# Altium PCB MDBU017A.PcbDoc (part 2 of 2)
Units mil, origin at the board's own origin, x right, y up, seen from the top; angles counter-clockwise.
Board outline 2200 x 2400 mil, 4 copper layers (Top Layer, Signal Layer 1, Signal Layer 2, Bottom Layer), stack 62.8 mil thick; 116 components, 72 nets, 394 pads, 309 vias.
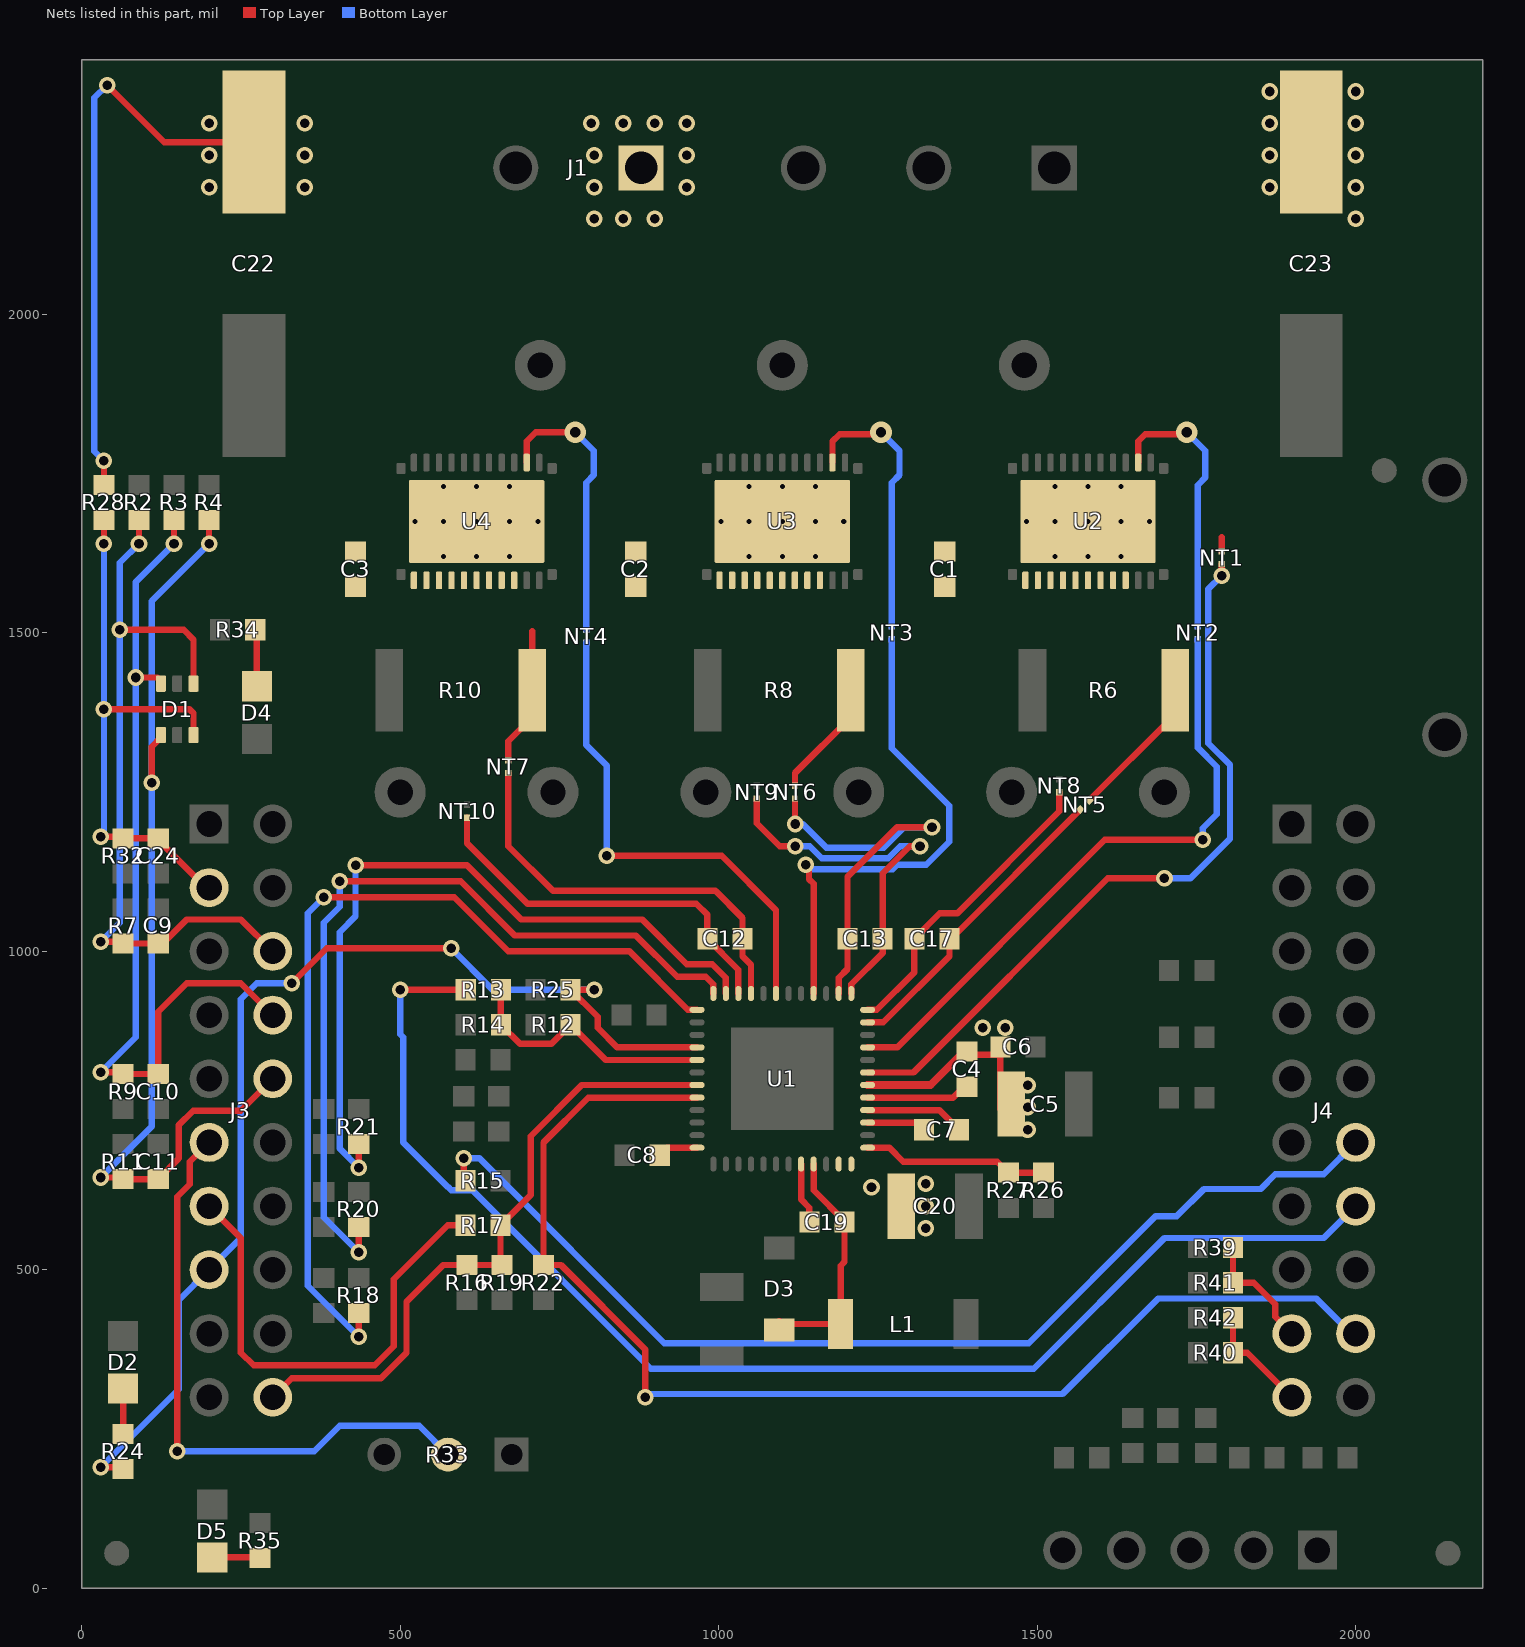
[diagram p4: the nets of this part, all layers, seen from the top]

## Via types
v1: diameter 26, hole 15, Top Layer to Bottom Layer, tented both sides, 250 vias
v2: diameter 19.68, hole 7.87, Top Layer to Bottom Layer, 45 vias
v3: diameter 34, hole 16, Top Layer to Bottom Layer, tented both sides, 9 vias
v4: diameter 26/26/26/26 (per signal layer), hole 15, Top Layer to Bottom Layer, tented both sides, 5 vias

## Nets (pads, with @x,y where several pads share a name; then routed paths per layer and width w, separated by ;. In a path a pad name is that pad's centre, name@x,y a point inside that pad or via, vN(x,y) a via of type N, cw(c..) or ccw(c..) an arc to the next point about the centre after c; other vN are vias at no path point) (continued)
NetC4_2: C4.2 U1.5 | length 151.1
  Top Layer w10: U1.5@1233.86,770.47 1368.03,770.47 C4.2@1380,782.44
NetC7_1: C7.1 U1.4 | length 156.5
  Top Layer w10: U1.4@1233.86,750.79 1346.77,750.79 C7.1@1377.56,720
NetC7_2: C7.2 U1.3 | length 93.2
  Top Layer w10: U1.3@1233.86,731.1 1311.34,731.1 C7.2@1322.44,720
NetC8_1: C8.1 U1.36 | length 63.4
  Top Layer w10: C8.1@907.56,680 919.29,691.73 U1.36@966.14,691.73
NetC19_1: C19.1 U1.44 | length 96.5
  Top Layer w10: U1.44@1129.53,666.14 1129.53,610.47 1142.44,597.56 C19.1@1142.44,575
NetC19_2: C19.2 D3.1 L1.1 U1.45 | length 372.2
  Top Layer w10: D3.1@1095,419.8 1099.8,415 L1.1@1191.57,415 1191.57,506.57 1197.56,512.56 C19.2@1197.56,575 1197.56,576.48 1149.21,624.83 U1.45@1149.21,666.14
NetD2_2: D2.2 R24.2 | length 71.1
  Top Layer w10: R24.2@65,242.56 D2.2@65,313.66
NetD4_2: D4.2 R34.2 | length 89.7
  Top Layer w10: R34.2@272.56,1505 275,1502.56 D4.2@275,1416.34
NetD5_2: D5.2 R35.2 | length 75.5
  Top Layer w10: D5.2@205,48.66 278.78,48.66 R35.2@280,47.44
NetJ4_17: J4.17 R39.1 R41.2 | length 192.3
  Top Layer w10: R39.1@1807.56,535 R41.2@1807.56,480 1840,480 1873.82,446.18 1873.82,426.18 J4.17@1900,400
NetJ4_19: J4.19 R40.1 R42.2 | length 176.4
  Top Layer w10: R42.2@1807.56,425 R40.1@1807.56,370 1830,370 J4.19@1900,300
NetNT2_1: NT2.1 U2.2 | length 437.4
  Top Layer w10: U2.2@1658.74,1767.52 1658.74,1800.71 1670.04,1812.01 1732.01,1812.01 v3(1735,1815)
  Bottom Layer w10: v3(1735,1815) 1764,1786 1764,1744 1752,1732 NT2.1@1752,1510
NetNT3_1: NT3.1 U3.2 | length 433.1
  Top Layer w10: U3.2@1178.74,1767.52 1178.74,1800.71 1190.04,1812.01 v3@1252.01,1812.01
  Bottom Layer w10: v3(1255,1815) 1284,1786 1284,1747.99 1272,1735.99 NT3.1@1272,1510
NetNT4_1: NT4.1 U4.2 | length 442.4
  Top Layer w10: U4.2@698.74,1767.52 698.74,1800.71 713.03,1815 v3(775,1815)
  Bottom Layer w10: v3(775,1815) 804,1786 804,1747.99 792,1735.99 NT4.1@792,1505
NetR12_1: R12.1 R13.1 R14.1 U1.29 | length 410.9
  Top Layer w10: R13.1@658.11,940 R14.1@658.11,885 688.11,855 737.56,855 R12.1@767.56,885 823.03,829.53 U1.29@966.14,829.53
NetR26_1: R26.1 R27.2 U1.1 | length 292.4
  Top Layer w10: U1.1@1233.86,691.73 1268.27,691.73 1290,670 1437.56,670 R27.2@1455,652.56 R26.1@1510,652.56
NFAULT: J3.15 R24.1 R25.1 U1.28 | length 1761.2
  Top Layer w10: v1(30,190) 62.44,190 R24.1@65,187.44 ; v1(330,950) 385,1005 v1(580,1005) ; v1(805,940) R25.1@767.56,940 810,897.56 810,880 840.79,849.21 U1.28@966.14,849.21
  Bottom Layer w10: v1(30,190) 152.5,312.5 152.5,452.5 J3.15@200,500 250,550 250,925 275,950 v1(330,950) ; v1(580,1005) 645,940 v1(805,940)
NSCS/GAIN: J4.18 R22.2 U1.32 | length 1954.7
  Top Layer w10: v1(885,300) 885,375 752.44,507.56 R22.2@725,507.56 725,700 795.47,770.47 U1.32@966.14,770.47
  Bottom Layer w10: v1(885,300) 890,305 1540,305 1690,455 1938.21,455 1993.21,400 J4.18@2000,400
POT: J3.11 R33.2 | length 965.9
  Top Layer w10: v1(150,215) 150,615 169.5,634.5 169.5,669.5 J3.11@200,700
  Bottom Layer w10: v1(150,215) 365,215 405,255 530,255 R33.2@575,210
SCLK: J3.13 R17.2 | length 764.1
  Top Layer w10: J3.13@200,600 250,550 250,370 270,350 460,350 490,380 490,485 575,570 R17.2@602.44,570
SDI: J4.12 R15.2 | length 1686.6
  Top Layer w10: v1(600,675) 600,642.44 R15.2@602.44,640
  Bottom Layer w10: v1(600,675) 624.64,675 914.64,385 1486.92,385 1685.92,584 1719,584 1762,627 1851.04,627 1874.04,650 1950,650 J4.12@2000,700
SDO: J4.14 R13.2 | length 2092.7
  Top Layer w10: v1(500,940) R13.2@602.99,940
  Bottom Layer w10: v1(500,940) 500,870 505,865 505,700 575,630 575.36,630 580.36,625 613.7,625 893.7,345 1495,345 1700,550 1950,550 J4.14@2000,600
SHA: NT2.2 U1.9 | length 997.6
  Top Layer w10: U1.9@1233.86,849.21 1280.33,849.21 1606.11,1175 v1(1760,1175)
  Bottom Layer w10: NT2.2@1752,1490 1752,1320 1782,1290 1782,1215.39 1760,1193.39 v1(1760,1175)
SHB: NT3.2 U1.16 | length 801.2
  Top Layer w10: v1@1142,1130.62 1142,1113.46 1149.21,1106.24 U1.16@1149.21,933.86
  Bottom Layer w10: v1(1136.74,1135.88) 1143.62,1129 1273.2,1129 1280.08,1135.88 1325.88,1135.88 1362.28,1172.28 1362.28,1228.83 1272,1319.11 NT3.2@1272,1490
SHC: NT4.2 U1.19 | length 780.5
  Top Layer w10: v1(824.31,1150) 1005,1150 1090.16,1064.84 U1.19@1090.16,933.86
  Bottom Layer w10: NT4.2@792,1485 792,1324.11 824.31,1291.8 v1(824.31,1150)
SLA: C1.2 NT5.2 R6.2 U2.12 U2.13 U2.14 U2.15 U2.16 U2.17 U2.18 U2.19 U2.20 | length 226.8
  Top Layer w10: NT5.2@1582.07,1237.07 R6.2@1712.2,1367.2 ; R6.2@1717.2,1367.2 R6.2@1717.2,1410
SLB: C2.2 NT6.2 R8.2 U3.12 U3.13 U3.14 U3.15 U3.16 U3.17 U3.18 U3.19 U3.20 | length 186.1
  Top Layer w10: NT6.2@1120,1260 1120,1280 1207.2,1367.2 R8.2@1207.2,1410
SLC: C3.2 NT7.2 R10.2 U4.12 U4.13 U4.14 U4.15 U4.16 U4.17 U4.18 U4.19 U4.20 | length 218.2
  Top Layer w10: NT7.2@670,1300 670,1330 707.2,1367.2 R10.2@707.2,1410 707.2,1502.8
SNA: C17.2 NT8.1 U1.12 | length 491.1
  Top Layer w10: U1.12@1233.86,908.27 1248.27,908.27 1307.44,967.44 C17.2@1307.44,1020 1347.44,1060 1375,1060 1535,1220 NT8.1@1535,1250
SNB: C13.2 NT9.1 U1.13 | length 611.1
  Top Layer w10: NT9.1@1060,1240 1060,1201.11 1096.11,1165 v1(1120,1165) ; U1.13@1208.27,933.86 1208.27,948.27 1257.56,997.56 C13.2@1257.56,1020 1257.56,1122.56 1300,1165 v1(1316.2,1165)
  Bottom Layer w10: v1(1120,1165) 1142.97,1165 1161.97,1146 1266.15,1146 1285.06,1164.91 1316.11,1164.91 v1(1316.2,1165)
SNC: C12.2 NT10.1 U1.22 | length 607.9
  Top Layer w10: NT10.1@605,1210 605,1170 700,1075 965,1075 982.44,1057.56 C12.2@982.44,1020 1031.1,971.34 U1.22@1031.1,933.86
SOA: R18.2 U1.25 | length 1430.3
  Top Layer w10: v1(380,1085) 585,1085 670,1000 860,1000 951.73,908.27 U1.25@966.14,908.27 ; v1(435,395) R18.2@435,432.44
  Bottom Layer w10: v1(380,1085) 355,1060 355,475 v1(435,395)
SOB: R20.2 U1.24 | length 1323.2
  Top Layer w10: v1(405,1110) 595,1110 680,1025 870,1025 935,960 980,960 991.73,948.27 U1.24@991.73,933.86 ; v1(435,527.76) R20.2@435,567.44
  Bottom Layer w10: v1(405,1110) 405,1070 380,1045 380,582.76 v1(435,527.76)
SOC: R21.2 U1.23 | length 1213.3
  Top Layer w10: v1(430,1135) 605,1135 690,1050 880,1050 950,980 990,980 1011.42,958.58 U1.23@1011.42,933.86 ; v1(435,660.57) R21.2@435,697.44
  Bottom Layer w10: v1(430,1135) 430,1055 405,1030 405,690.57 v1(435,660.57)
SPA: C17.1 NT5.1 U1.11 | length 484.5
  Top Layer w10: U1.11@1233.86,888.58 1258.58,888.58 1362.56,992.56 C17.1@1362.56,1020 1365,1020 NT5.1@1565,1220
SPB: C13.1 NT6.1 U1.14 | length 637.6
  Top Layer w10: v1(1120,1200) NT6.1@1120,1240 ; U1.14@1188.58,933.86 1188.58,958.58 1202.44,972.44 C13.1@1202.44,1020 1202.44,1117.44 1280,1195 v1(1335,1195)
  Bottom Layer w10: v1(1120,1200) 1132.02,1200 1169.02,1163 1259.11,1163 1291.11,1195 v1(1335,1195)
SPC: C12.1 NT7.1 U1.21 | length 653.2
  Top Layer w10: NT7.1@670,1280 670,1165 740,1095 995,1095 1037.56,1052.44 C12.1@1037.56,1020 1037.56,992.44 1050.79,979.21 U1.21@1050.79,933.86
VDRAIN: NT1.1 U1.7 | length 1175.2
  Top Layer w10: U1.7@1233.86,809.84 1305.96,809.84 1611.11,1115 v1(1700,1115) ; v1(1790,1590) NT1.1@1790,1608.24
  Bottom Layer w10: v1(1700,1115) 1740.96,1115 1802.98,1177.02 1802.98,1293.06 1769,1327.04 1769,1569 v1(1790,1590)
VDS: J3.20 R16.1 R17.1 R19.2 U1.31 | length 1006.8
  Top Layer w10: J3.20@300,300 330,330 470,330 510,370 510,450 567.56,507.56 R16.1@605,507.56 R19.2@660,507.56 ; R19.2@657.56,510 R17.1@657.56,570 705,617.44 705,710 785.16,790.16 U1.31@966.14,790.16
VM: C1.1 C2.1 C3.1 C4.1 C5.1 C6.1 C20.1 C22.1 C23.1 J1.1 NT1.2 R28.2 U1.6 U1.47 U1.48 U2.27 U3.27 U4.27 | length 1251.6
  Top Layer w10: R28.2@35,1732.56 v1(35,1770) ; v1(40,2360) 129.54,2270.46 C22.1@270.49,2270.46 ; C4.1@1380,837.56 1440,837.56 1442.44,840 1442.44,752.6 C5.1@1445.04,750 ; NT1.2@1790,1628.24 1790,1650
  Top Layer w12: U1.6@1233.86,790.16 1332.6,790.16 C4.1@1380,837.56
  Bottom Layer w10: v1(35,1770) 20,1785 20,2340 v1(40,2360)
  other v1: 1325,565 1325,600 1240,630 1325,635 1485,720 1485,755 1485,790 1415,880 1450,880 805,2150 850,2150 900,2150 2000,2150 200,2200 350,2200 805,2200 950,2200 1865,2200 2000,2200 200,2250 350,2250 805,2250 950,2250 1865,2250 2000,2250 200,2300 350,2300 800,2300 850,2300 900,2300 950,2300 1865,2300 2000,2300 1865,2350 2000,2350
  other v2: 568.03,1619.88 620,1619.88 671.97,1619.88 1048.03,1619.88 1100,1619.88 1151.97,1619.88 1528.03,1619.88 1580,1619.88 1631.97,1619.88 523.54,1675 568.03,1675 620,1675 671.97,1675 716.46,1675 1003.54,1675 1048.03,1675 1100,1675 1151.97,1675 1196.46,1675 1483.54,1675 1528.03,1675 1580,1675 1631.97,1675 1676.46,1675 568.03,1730.12 620,1730.12 671.97,1730.12 1048.03,1730.12 1100,1730.12 1151.97,1730.12 1528.03,1730.12 1580,1730.12 1631.97,1730.12
VSENA: C9.1 D1.1 J3.6 R2.1 R7.2 | length 1181.8
  Top Layer w10: v1(30,1015) 62.44,1015 R7.2@65,1012.44 127.44,1012.44 165,1050 250,1050 J3.6@300,1000 ; v1(60,1505) 160,1505 175.59,1489.41 D1.1@175.59,1424.29 ; v1(90,1640) R2.1@90,1677.44
  Bottom Layer w10: v1(30,1015) 60,1045 v1(60,1505) 60,1610 v1(90,1640)
VSENB: C10.1 D1.3 J3.8 R3.1 R9.2 | length 1363.8
  Top Layer w10: v1(30,810) R9.2@62.56,810 ; R9.2@65,807.56 C10.1@122.56,807.56 ; v1(85,1430) 118.7,1430 D1.3@124.41,1424.29 ; C10.1@120,807.56 120,905 165,950 250,950 J3.8@300,900 ; v1(145,1640) R3.1@145,1677.44
  Bottom Layer w10: v1(30,810) 85,865 v1(85,1430) 85,1580 v1(145,1640)
VSENC: C11.1 D1.4 J3.10 R4.1 R11.2 | length 1550.3
  Top Layer w10: v1(30,645) 62.44,645 R11.2@65,642.44 C11.1@120,642.44 152.5,674.94 152.5,727.5 175,750 250,750 J3.10@300,800 ; v1@112.6,1267.6 v1(110,1265) 110,1321.3 D1.4@124.41,1335.71 ; v1(200,1640) R4.1@200,1677.44
  Bottom Layer w10: v1(30,645) 110,725 v1(110,1265) 110,1550 v1(200,1640)
VSENVM: C24.1 D1.6 J3.3 R28.1 R32.2 | length 885.9
  Top Layer w10: v1(30,1180) 62.56,1180 R32.2@65,1177.56 117.56,1177.56 197.56,1097.56 J3.3@200,1100 ; v1(35,1380) 169.27,1380 175.59,1373.68 D1.6@175.59,1335.71 ; v1(35,1640) R28.1@35,1677.44
  Bottom Layer w10: v1(30,1180) 35,1185 v1(35,1380) v1(35,1640)
pads on no net: FID1.1 FID2.1 FID3.1 J3.2 J3.5 J3.7 J3.17 J3.19 J4.8 J4.10 LBL1.0 U2. U2.21 U2.23 U2.24 U2.25 U2.26 U3. U3.21 U3.23 U3.24 U3.25 U3.26 U4. U4.21 U4.23 U4.24 U4.25 U4.26

## Polygon pours and split planes (outlines as drawn)
GND on Top Layer "TOP_GND" (solid, remove dead copper, pour order 30): 0,0 2200,0 2200,2400 0,2400 0,0
VM on Top Layer "Top Layer-No Net" (solid, remove dead copper, pour order 2): 398.5,1739.81 1830,1739.81 1830,1610.19 398.5,1610.19
MOTB on Top Layer "MOTB" (solid, pour order 0): 930,1750 1330,1750 1330,2090 1420,2180 1420,2380 1230,2380 1230,2200 1230,2170 930,1870
MOTA on Top Layer "MOTA" (solid, pour order 1): 1435,2380 1435,2210 1435,2170 1405,2140 1350,2085 1350,1860 1350,1750 1440,1750 1570,1750 1830,1750 1830,2380
MOTC on Top Layer "MOTC" (solid, pour order 3): 430,1750 570,1750 930,1750 1215,2180 1215,2380 1020,2380 1020,2215 905,2100 530,2100 430,2000
VM on Top Layer "VM_TOP" (solid, pour order 9): 20,2380 1000,2380 1000,2225 895,2120 790,2120 790,2260 735,2315 640,2315 480,2315 320,2155 20,2155
GND on Top Layer "GND_TOP" (solid, pour order 10): 770,2250 770,2120 635,2120 520,2120 445,2045 410,2010 410,1890 410,1795 210,1795 20,1795 20,2135 335,2135 495,2295 725,2295
VM on Top Layer "VM_TOP2" (solid, pour order 11): 1850,2380 2180,2380 2180,2180 2180,2090 1850,2090
GND on Top Layer "GND_TOP2" (solid, pour order 12): 1850,2070 2180,2070 2180,1900 2180,1700 1850,1700
SLC on Top Layer "SP1" (solid, pour order 15): 400,1620 765,1620 765,1340 750,1325 735,1310 680,1310 655,1310 630,1335 620,1345 500,1345 500,1490 400,1490
SLB on Top Layer "SP2" (solid, pour order 16): 1125,1620 1275,1620 1275,1460 1275,1345 1250,1320 1240,1310 1125,1310 995,1310 995,1490 840,1490 840,1620
SLA on Top Layer "SP3" (solid, pour order 18): 1530,1490 1300,1490 1300,1590 1775,1590 1775,1310 1530,1315
VM on Bottom Layer "BOTTOM_VM" (solid, remove dead copper, pour order 27): 0,2400 2200,2400 2200,1550 0,1550
GND on Bottom Layer "BOT_GND" (solid, pour order 29): 0,0 2200,0 2200,370 2200,2400 0,2400
GND on Signal Layer 1 "GND_PLANE" (solid, pour order 25): 0,2400 2200,2400 2200,0 0,0
3.3V on Signal Layer 2 "3.3V_PLANE" (solid, pour order 28): 0,1285 935,1285 935,700 1070,565 1145,490 1225,490 1305,490 1490,675 1515,700 1515,735 1515,1285 2200,1285 2200,0 0,0
VM on Signal Layer 2 "VM_PLANE" (solid, pour order 26): 0,2400 2200,2400 2200,1300 1500,1300 1500,1225 1500,705 1300,505 1210,505 1150,505 950,705 950,1050 950,1300 0,1300

## Keep-outs
Keep-Out Layer:
  text ".Layer_Name" at 577,-858.49 h60

## Other copper
Top Layer:
  region net GND: 1355,650 1420,650 1420,620 1425,615 1470,615 1470,560 1425,515 1355,515
  region net 3.3V: 970,420 1040,420 1040,370 1055,355 1060,360 1220,360 1230,370 1230,500 1430,500 1495,565 1495,610 1525,610 1525,445 1320,240 970,240
  region net GND: 1110,575 1110,540 1165,540 1165,525 1115,475 1035,475 1035,450 945,450 945,500 960,515 1030,515 1090,575
  region net NetC19_2: 1210,590 1210,375 1060,375 1060,465 1120,465 1175,520 1175,590
  region net VM: 1184,678 1257,678 1281.85,653.15 1339.98,653.15 1340,544.88 1247,544.88 1247,602 1224,625 1204,625 1184,645
  region net VM: 1370,855 1430,915 1475,915 1475,795 1475,705 1420,705 1420,810 1407.44,822.56 1370,822.56
  region net GND: 870,695 870,635 795,560 795,660 830,695
  region net VM: 1510,805 1460,805 1460,705 1510,705
  text ".Layer_Name" at 577,-858.49 h60
Bottom Layer:
  rectangle net GND: 1810,1435 2184.71,2025
  rectangle net GND: 190,1825 480,2130
  rectangle net GND: 395,2110.8 772.72,2307.31
  text ".Layer_Name" at 577,-858.49 h60

## Silkscreen, mask and mechanical layers (free items; w line width, h text height)
Top Overlay:
  lines w10: 340,1800 340,1285 440,1285 ; 560,1285 680,1285 ; 800,1285 920,1285 ; 1040,1285 1160,1285 ; 1280,1285 1400,1285 ; 1520,1285 1640,1285 ; 1760,1285 2085,1285 2085,1715 ; 800,275 1610,275 1610,970 800,970 800,275
  text "GND-" at 585,1975 h70
  text "VM+" at 865,1975 h70
  text "C" at 1135,1975 h70
  text "B" at 1325,1975 h70
  text "A" at 1520,1975 h70
  text "MOTC" at 770,1880 h50
  text "MOTB" at 1150,1880 h50
  text "MOTA" at 1530,1880 h50
  text "Hot Surface" at 935,1505 h70
  text "GND" at 2160.67,1485 h70 r90
  text "GHC" at 430,1135 h70
  text "GLC" at 680,1135 h70
  text "GHB" at 910,1135 h70
  text "GLB" at 1155,1135 h70
  text "GHA" at 1390,1135 h70
  text "GLA" at 1635,1135 h70
  text "'.PRJ_Number' .PCB_Rev" at 2175,890 h70 r90
  text "FLT" at 15,430 h70
  text "DRV8323RX" at 1015,200 h70
  text "LED" at 155,170 h70
  text "BOOSTXL-DRV8323RX" at 2175,150 h70 r90
  text "+" at 1525,130 h70
  text "A" at 1625,130 h70
  text "B" at 1725,130 h70
  text "C" at 1825,130 h70
  text "-" at 1925,130 h70
  text "HALL" at 1320,40 h70
  text ".Layer_Name" at 577,-858.49 h60
Bottom Overlay:
  drawing of 3493 lines, arcs and shapes, not listed
  text ".Layer_Name" at 577,-858.49 h60
Top Paste:
  text ".Layer_Name" at 577,-858.49 h60
Bottom Paste:
  text ".Layer_Name" at 577,-858.49 h60
Top Solder:
  text ".Layer_Name" at 577,-858.49 h60
  text ".Layer_Name" at 577,-858.49 h60
Bottom Solder:
  text ".Layer_Name" at 577,-858.49 h60
Drill Guide:
  text ".Layer_Name" at 577,-858.49 h60
M1 Board Outline:
  the board outline again, w10
  text ".Layer_Name" at 577,-858.49 h60
M2 Board Dimensions:
  rectangle: 125,-400 500,-275
  rectangle: 0,-275 125,-150
  lines w7: 0,-275 1000,-275 ; 125,-400 125,-150 ; 250,-400 250,-150 ; 500,-400 500,-150 ; 750,-400 750,-150 ; 0,-400 0,-150 1000,-150 1000,-400 0,-400
  text ".Layer_Name" at 577,-858.49 h60
M3 3D STEP Top:
  text ".Layer_Name" at 577,-858.49 h60
M4 3D STEP Bottom:
  text ".Layer_Name" at 577,-858.49 h60
M5 Assembly Top:
  lines w10: -292,-930.17 6308,-930.17 ; -292,-726.83 6310,-726.83 ; -292,-523.5 -292,-1133.5 3713,-1133.5 6310,-1133.5 6310,-523.5 -291.5,-523.5 -291.5,-1133.5 1284,-1133.5 ; 2173,-1133.5 2173,-523.5 ; 3440,-726.83 3440,-523.5 ; 4280,-726.83 4280,-523.5 ; 4902,-1140 4902,-937.17
  text "COMPONENTS MARKED 'DNP' SHOULD NOT BE POPULATED." at 1153.5,-318.5 h60
  text "ASSEMBLY VARIANT:" at 1153,-434 h60
  text ".VariantName" at 2189,-434 h60
  text "PCB VIEWED FROM TOP SIDE" at -228.5,-655.67 h60
  text "BOARD #:" at 2248,-655.67 h60
  text ".PRJ_Number" at 2793.5,-655.67 h60
  text "REV:" at 3638,-655.67 h60
  text ".PCB_Rev" at 3929.5,-655.67 h60
  text "SVN REV:" at 4476,-655.67 h60
  text ".VersionControl_RevNumber" at 4982,-655.67 h60
  text "TID #:" at 2248,-859 h60
  text ".TID" at 2793.5,-859 h60
  text "PLOT NAME =" at -228.5,-1064.34 h60
  text ".plot_File_Name" at 577,-1064.34 h60
  text "GENERATED    :" at 2250,-1064.34 h60
  text ".Print_Date" at 3119.5,-1064.34 h60
  text ".Print_Time" at 3848.5,-1064.34 h60
  text "TEXAS INSTRUMENTS" at 5113,-1064.34 h60
M6 Assembly Bottom:
  lines w10: -292.5,-727.33 6309.5,-727.33 ; -290.5,-930.67 6309.5,-930.67 ; 1115.5,-1140.5 1115.5,-937.67 ; 1737.5,-727.33 1737.5,-524 ; 2577.5,-727.33 2577.5,-524 ; 3844.5,-1134 3844.5,-524 ; 4733.5,-1134 6309,-1134 6309,-524 -292.5,-524 -292.5,-1134 2304.5,-1134 6309.5,-1134 6309.5,-524
  text "COMPONENTS MARKED 'DNP' SHOULD NOT BE POPULATED." at 6102,-318 h60
  text ".VariantName" at 5058,-434 h60
  text "ASSEMBLY VARIANT:" at 6097,-434 h60
  text ".VersionControl_RevNumber" at 1035.5,-656.17 h60
  text "SVN REV:" at 1541.5,-656.17 h60
  text ".PCB_Rev" at 2088,-656.17 h60
  text "REV:" at 2379.5,-656.17 h60
  text ".PRJ_Number" at 3224,-656.17 h60
  text "BOARD #:" at 3769.5,-656.17 h60
  text "PCB VIEWED FROM BOTTOM SIDE" at 6246,-656.17 h60
  text ".TID" at 3224,-859.5 h60
  text "TID #:" at 3769.5,-859.5 h60
  text "TEXAS INSTRUMENTS" at 904.5,-1064.84 h60
  text ".Print_Time" at 2169,-1064.84 h60
  text ".Print_Date" at 2898,-1064.84 h60
  text "GENERATED    :" at 3767.5,-1064.84 h60
  text ".plot_File_Name" at 5440.5,-1064.84 h60
  text "PLOT NAME =" at 6246,-1064.84 h60
M9 Title Sheet:
  drawing of 57 lines, arcs and shapes, not listed
  text "1" at 739.84,8036.5 h70
  text "2" at 3235.5,8036.5 h70
  text "3" at 5724.84,8036.5 h70
  text "4" at 8231.51,8036.5 h70
  text "5" at 10730.5,8036.5 h70
  text "6" at 13235.5,8036.5 h70
  text "A" at -416.5,6893.5 h70
  text "A" at 14383.5,6893.5 h70
  text "B" at -416.5,4513.5 h70
  text "B" at 14383.5,4513.5 h70
  text "C" at -416.5,2138.5 h70
  text "C" at 14383.5,2138.5 h70
  text "PROJECT TITLE:" at 11343.5,277.5 h45
  text ".PRJ_Title" at 11393.5,144.17 h70
  text "DESIGNED FOR:" at 11343.5,-23.5 h45
  text ".PRJ_Customer" at 11393.5,-163.5 h70
  text "D" at -416.5,-231.5 h70
  text "D" at 14383.5,-231.5 h70
  text "FILE NAME:" at 11343.5,-323.5 h45
  text ".PCB_File_Name_No_Path" at 11393.5,-443.5 h70
  text "Texas Instruments (TI) and/or its licensors do not warrant the accuracy or completeness of this specification" at 6374,-605.34 h45
  text "ENGINEER:" at 11343.5,-613.5 h45
  text "LAYOUT BY:" at 12848.5,-613.5 h45
  text "or any information contained therein. TI and/or its licensors do not warrant that this design will meet" at 6329.01,-718 h45
  text ".PRJ_Engineer" at 11393.5,-768.49 h70
  text ".PCB_Layout" at 12899,-768.49 h70
  text "the specifications, will be suitable for your application or fit for any particular purpose, or will operate in" at 6329.01,-830.67 h45
  text ".Layer_Name" at 577,-858.49 h60
  text "ALTIUM DESIGNER VERSION:" at 12848.5,-923.5 h45
  text "an implementation. TI and/or its licensors do not warrant that the design is production worthy. You should" at 6329.01,-943.33 h45
  text "completely validate and test your design implementation to confirm the system functionality for your application." at 6374,-1056 h45
  text ".print_Scale" at 11393.5,-1056.83 h70
  text ".Application_BuildNumber" at 12899,-1056.83 h70
  text "1" at 739.84,-1263.5 h70
  text "2" at 3235.5,-1263.5 h70
  text "3" at 5724.84,-1263.5 h70
  text "4" at 8231.51,-1263.5 h70
  text "5" at 10730.5,-1263.5 h70
  text "6" at 13235.5,-1263.5 h70
M10 Fab Notes:
  drawing of 173 lines, arcs and shapes, not listed
  text "DESIGN INFORMATION" at 12378.02,6201 h60
  text "MIN. TRACK WIDTH:" at 11733.46,6021 h60
  text "8" at 12829.7,6021 h60
  text "MIL" at 12984.46,6021 h60
  text "MIN. CLEARANCE:" at 11733.46,5889 h60
  text "0.2" at 12769.7,5889 h60
  text "mm" at 12984.46,5889 h60
  text "MIN. VIA PAD SIZE:" at 11733.46,5757 h60
  text "24" at 12799.71,5757 h60
  text "MIL" at 12984.46,5757 h60
  text "0.05mm (2MIL)" at 12428.46,5615.29 h60
  text "MINIMUM ANNULAR RING" at 11404.23,5611 h60
  text "EXTERNAL" at 13136.46,5611 h60
  text "PER" at 11604.23,5493 h60
  text "IPC-D-275 CLASS 2 LEVEL C" at 11824.23,5493 h60
  text "MIL, HOLES" at 13312.46,5380.71 h60
  text "+/-" at 12920,5380 h60
  text "+/-" at 13774,5380 h60
  text "REGISTRATION TOLERANCES:" at 11404.23,5375 h60
  text "METAL" at 12604,5375 h60
  text "5" at 13180.2,5375 h60
  text "3" at 14013.2,5375 h60
  text "MIL" at 14129.46,5375 h60
  text "+/-" at 13774,5262 h60
  text "HOLE SIZE TOLERANCE (UNLESS OTHERWISE SPECIFIED):" at 11404.23,5257 h60
  text "3" at 14013.2,5257 h60
  text "MIL" at 14129.46,5257 h60
  text "MATERIAL:" at 11329.46,5047.54 h60
  text "FR-4 High Tg" at 12315.9,4907.21 h60
  text "FR-408" at 11750.46,4898.64 h60
  text "OTHER" at 13238.46,4898.64 h60
  text "X" at 12161,4895 h60
  text "62 MIL (1.6mm) +/-10%" at 12070.56,4735.92 h60
  text "THICKNESS:" at 11404.23,4731.64 h60
  text "X" at 11942.4,4731.64 h60
  text "OTHER" at 13355.46,4731.64 h60
  text "TOLERANCE:" at 11404.23,4573.64 h60
  text "X" at 12243.53,4573.64 h60
  text "ANSI IPC-6012 TYPE 3 CLASS 2" at 12430.48,4573.64 h60
  text "OTHER +/-" at 12430.46,4417.64 h60
  text "BOW & TWIST:" at 11404.23,4260.64 h60
  text "X" at 12243.53,4260.64 h60
  text "ANSI IPC-6012 TYPE 3 CLASS 2" at 12430.48,4260.64 h60
  text "OTHER +/-" at 12430.46,4102.13 h60
  text "DRILLING:" at 11329.46,3963.64 h60
  text "REFERENCE:" at 11404.23,3846.64 h60
  text "X" at 12052.46,3846.64 h60
  text "AS SHOWN" at 12239.46,3846.64 h60
  text "X" at 12953.46,3846.64 h60
  text "NC_DRILL FILES" at 13090.46,3846.64 h60
  text "PTH COPPER THICKNESS:" at 11404.23,3688.64 h60
  text "X" at 12534.46,3688.64 h60
  text "20-30 um" at 12671.46,3688.64 h60
  text "OTHER" at 13388.46,3688.64 h60
  text "BOARD FINISH:" at 11329.46,3529.64 h60
  text "SILKSCREEN:" at 11484.68,3411.64 h60
  text "X" at 12433.46,3411.64 h60
  text "TOP" at 12559.46,3411.64 h60
  text "X" at 12943.46,3411.64 h60
  text "BOTTOM" at 13070.46,3411.64 h60
  text "SILKSCREEN COLOR:" at 11484.68,3244.64 h60
  text "X" at 12432.42,3244.64 h60
  text "WHITE" at 12559.46,3244.64 h60
  text "OTHER" at 13070.46,3244.64 h60
  text "X" at 13150,3090 h60
  text "GREEN" at 12690.46,3085.44 h60
  text "OTHER" at 13308.46,3085.44 h60
  text "RED" at 13662,3082 h60
  text "SOLDER RESIST COLOR:" at 11484.68,3074.64 h60
  text "X" at 12563.42,2915.44 h60
  text "MATTE" at 12690.46,2915.44 h60
  text "SEMI-GLOSS" at 13308,2914.8 h60
  text "IMMERSION GOLD (ENIG)" at 12390.46,2726.92 h60
  text "ENEPIG" at 13728,2723.64 h60
  text "SURFACE FINISH:" at 11329.46,2722.64 h60
  text "X" at 12203.51,2722.64 h60
  text "IMM. TIN/SILVER OR EQUIV" at 11659,2565.64 h60
  text "OTHER" at 13090.46,2565.64 h60
  text "ARRAY/PANEL:" at 11329.46,2386.64 h60
  text "CUT AND TRIM PER M1 BOARD OUTLINE" at 12390.46,2382.35 h60
  text "N.C. ROUTE" at 12390.46,2230.64 h60
  text "X" at 13069.46,2230.64 h60
  text "V. SCORE" at 13256.46,2230.64 h60
  text "CERTIFICATION:" at 11329.46,2093.64 h60
  text "MATERIALS AND WORKMANSHIP FOR ALL PCBS" at 12054.46,2093.64 h60
  text "TO MEET OR EXCEED THE REQUIREMENTS OF:" at 12054.46,1995.64 h60
  text "X" at 11680.96,1859.13 h60
  text "ANSI IPC-A-600F CLASS ->" at 11819.96,1859.13 h60
  text "X" at 13459.02,1859.13 h60
  text "2" at 13577.96,1859.14 h60
  text "1" at 13262.96,1857.64 h60
  text "3" at 13931.96,1857.64 h60
  text "X" at 12495.02,1699.64 h60
  text "RoHS" at 12631.96,1699.64 h60
  text "OTHER" at 13276.36,1699.64 h60
  text "PER ORDER" at 13673.42,1699.64 h60
  text "ALL BOARDS MUST MEET OR EXCEED UL94-V0 REQUIREMENTS." at 11357,1534 h60
  text "PCB MUST BEAR THE UL94V-0 UL REGISTERED MATERIAL ID NUMBER" at 11357,1414 h60
  text "ADDITIONAL REQUIREMENTS:" at 11329.46,1240.64 h60
  text "MICROSECTION:" at 11404.23,1125.64 h60
  text "YES" at 12309.96,1125.64 h60
  text "REQUIRED" at 13171.46,969.49 h60
  text "BARE BOARD ELEC. TEST:" at 11404.23,966.64 h60
  text "NONE" at 12709.96,966.64 h60
  text "X" at 13044.46,966.64 h60
  text "PER ORDER" at 13763.46,966.64 h60
  text ".Layer_Name" at 577,-858.49 h60
M11 Gerber Information:
  lines w10: -292,-930.17 6308,-930.17 ; -292,-726.83 6310,-726.83 ; -292,-523.5 -292,-1133.5 3713,-1133.5 6310,-1133.5 6310,-523.5 -291.5,-523.5 -291.5,-1133.5 1284,-1133.5 ; 2173,-1133.5 2173,-523.5 ; 3440,-726.83 3440,-523.5 ; 4280,-726.83 4280,-523.5 ; 4902,-1140 4902,-937.17
  text "ALL ARTWORK VIEWED FROM TOP SIDE" at -228.5,-655.67 h60
  text "BOARD #:" at 2248,-655.67 h60
  text ".PRJ_Number" at 2793.5,-655.67 h60
  text "REV:" at 3638,-655.67 h60
  text ".PCB_Rev" at 3929.5,-655.67 h60
  text "SVN REV:" at 4476,-655.67 h60
  text ".VersionControl_RevNumber" at 4982,-655.67 h60
  text "LAYER NAME =" at -228.5,-858.49 h60
  text "TID #:" at 2248,-859 h60
  text ".TID" at 2793.5,-859 h60
  text "PLOT NAME =" at -228.5,-1064.34 h60
  text ".plot_File_Name" at 577,-1064.34 h60
  text "GENERATED    :" at 2250,-1064.34 h60
  text ".Print_Date" at 3119.5,-1064.34 h60
  text ".Print_Time" at 3848.5,-1064.34 h60
  text "TEXAS INSTRUMENTS" at 5113,-1064.34 h60
M12 Stackup:
  drawing of 295 lines, arcs and shapes, not listed
  text "Layer" at 9705.58,7790 h60
  text "Name" at 10115.49,7790 h60
  text "Material" at 11055.23,7790 h60
  text "Thickness" at 11915,7790 h60
  text "Constant" at 12564.84,7790 h60
  text "Board Layer Stack" at 13134.7,7790 h60
  text "1" at 9705.58,7670 h60
  text "Top Overlay" at 10115.49,7670 h60
  text "2" at 9705.58,7550 h60
  text "Top Solder" at 10115.49,7550 h60
  text "Solder Resist" at 11055.23,7550 h60
  text "0.40mil" at 11915,7550 h60
  text "3.5" at 12564.84,7550 h60
  text "3" at 9705.58,7430 h60
  text "Top Layer" at 10115.49,7430 h60
  text "Copper" at 11055.23,7430 h60
  text "2.80mil" at 11915,7430 h60
  text "4" at 9705.58,7310 h60
  text "Dielectric 1" at 10115.49,7310 h60
  text "FR-4" at 11055.23,7310 h60
  text "8.00mil" at 11915,7310 h60
  text "4.2" at 12564.84,7310 h60
  text "5" at 9705.58,7190 h60
  text "Signal Layer 1" at 10115.49,7190 h60
  text "Copper" at 11055.23,7190 h60
  text "1.40mil" at 11915,7190 h60
  text "6" at 9705.58,7070 h60
  text "Dielectric 2" at 10115.49,7070 h60
  text "FR-4" at 11055.23,7070 h60
  text "38.40mil" at 11915,7070 h60
  text "4.2" at 12564.84,7070 h60
  text "7" at 9705.58,6950 h60
  text "Signal Layer 2" at 10115.49,6950 h60
  text "Copper" at 11055.23,6950 h60
  text "1.40mil" at 11915,6950 h60
  text "8" at 9705.58,6830 h60
  text "Dielectric 3" at 10115.49,6830 h60
  text "FR-4" at 11055.23,6830 h60
  text "8.00mil" at 11915,6830 h60
  text "4.2" at 12564.84,6830 h60
  text "9" at 9705.58,6710 h60
  text "Bottom Layer" at 10115.49,6710 h60
  text "Copper" at 11055.23,6710 h60
  text "2.80mil" at 11915,6710 h60
  text "10" at 9705.58,6590 h60
  text "Bottom Solder" at 10115.49,6590 h60
  text "Solder Resist" at 11055.23,6590 h60
  text "0.40mil" at 11915,6590 h60
  text "3.5" at 12564.84,6590 h60
  text "11" at 9705.58,6470 h60
  text "Bottom Overlay" at 10115.49,6470 h60
  text ".Layer_Name" at 577,-858.49 h60
M13 Component Bodies Top:
  text ".Layer_Name" at 577,-858.49 h60
M14 Component Bodies Bottom:
  text ".Layer_Name" at 577,-858.49 h60
M15 Courtyards Top:
  text ".Layer_Name" at 577,-858.49 h60
M16 Courtyards Bottom:
  text ".Layer_Name" at 577,-858.49 h60
Drill Drawing:
  lines w10: 5336.09,2492.74 5391.34,2492.74 5391.34,2547.99 5336.09,2547.99 5336.09,2492.74 ; 5336.09,2617.06 5363.72,2630.87 5391.34,2617.06 5377.53,2644.68 5391.34,2672.31 5363.72,2658.5 5336.09,2672.31 5349.9,2644.68 5336.09,2617.06 ; 5336.09,2796.63 5391.34,2796.63 5363.72,2741.38 5336.09,2796.63 ; 5336.09,2879.51 5349.9,2879.51 5363.72,2865.7 5377.53,2879.51 5391.34,2879.51 5377.53,2893.32 5391.34,2907.14 5377.53,2907.14 5363.72,2920.95 5349.9,2907.14 5336.09,2907.14 5349.9,2893.32 5336.09,2879.51 ; 5336.09,2990.02 5336.09,3003.83 5349.9,3017.64 5336.09,3031.46 5336.09,3045.27 5349.9,3045.27 5363.72,3031.46 5377.53,3045.27 5391.34,3045.27 5391.34,3031.46 5377.53,3017.64 5391.34,3003.83 5391.34,2990.02 5377.53,2990.02 5363.72,3003.83 5349.9,2990.02 5336.09,2990.02 ; 5336.09,3114.34 5391.34,3114.34 5391.34,3169.59 5336.09,3169.59 5336.09,3114.34 ; 5336.09,3252.47 5349.9,3252.47 5349.9,3238.66 5377.53,3238.66 5377.53,3252.47 5391.34,3252.47 5391.34,3280.1 5377.53,3280.1 5377.53,3293.91 5349.9,3293.91 5349.9,3280.1 5336.09,3280.1 5336.09,3252.47 ; 5347.14,3125.39 5380.29,3125.39 5380.29,3158.54 5347.14,3158.54 5347.14,3125.39
  lines w12: 5286,2455.44 8517.49,2455.44 ; 5286,3325.68 8517.49,3325.68 ; 5623.86,2331.12 5623.86,3450 ; 5955.86,2331.12 5955.86,3450 ; 6592.43,2331.12 6592.43,3450 ; 6851.57,2331.12 6851.57,3450 ; 7226.72,2331.12 7226.72,3450 ; 7951.05,2331.12 7951.05,3450 ; 5286,2331.12 8517.49,2331.12 8517.49,3450 5286,3450 5286,2331.12
  text "Symbol" at 5360.59,3362.98 h72
  text "Quantity" at 5661.16,3362.98 h72
  text "Finished Hole Size" at 5993.16,3362.98 h72
  text "Plated" at 6629.72,3362.98 h72
  text "Hole Type" at 6888.86,3362.98 h72
  text "Drill Layer Pair" at 7264.02,3362.98 h72
  text "Hole Tolerance" at 7988.35,3362.98 h72
  text "45" at 5661.16,3238.66 h60
  text "7.87mil (0.200mm)" at 5993.16,3238.66 h60
  text "PTH" at 6629.72,3238.66 h60
  text "Round" at 6888.86,3238.66 h60
  text "Top Layer - Bottom Layer" at 7264.02,3238.66 h60
  text "255" at 5661.16,3114.34 h60
  text "15.00mil (0.381mm)" at 5993.16,3114.34 h60
  text "PTH" at 6629.72,3114.34 h60
  text "Round" at 6888.86,3114.34 h60
  text "Top Layer - Bottom Layer" at 7264.02,3114.34 h60
  text "9" at 5661.16,2990.02 h60
  text "16.00mil (0.406mm)" at 5993.16,2990.02 h60
  text "PTH" at 6629.72,2990.02 h60
  text "Round" at 6888.86,2990.02 h60
  text "Top Layer - Bottom Layer" at 7264.02,2990.02 h60
  text "3" at 5661.16,2865.7 h60
  text "33.46mil (0.850mm)" at 5993.16,2865.7 h60
  text "PTH" at 6629.72,2865.7 h60
  text "Round" at 6888.86,2865.7 h60
  text "Top Layer - Bottom Layer" at 7264.02,2865.7 h60
  text "14" at 5661.16,2741.38 h60
  text "40.00mil (1.016mm)" at 5993.16,2741.38 h60
  text "PTH" at 6629.72,2741.38 h60
  text "Round" at 6888.86,2741.38 h60
  text "Top Layer - Bottom Layer" at 7264.02,2741.38 h60
  text "40" at 5661.16,2617.06 h60
  text "40.16mil (1.020mm)" at 5993.16,2617.06 h60
  text "PTH" at 6629.72,2617.06 h60
  text "Round" at 6888.86,2617.06 h60
  text "Top Layer - Bottom Layer" at 7264.02,2617.06 h60
  text "7" at 5661.16,2492.74 h60
  text "51.18mil (1.300mm)" at 5993.16,2492.74 h60
  text "PTH" at 6629.72,2492.74 h60
  text "Round" at 6888.86,2492.74 h60
  text "Top Layer - Bottom Layer" at 7264.02,2492.74 h60
  text "373 Total" at 5661.16,2368.42 h60
  text ".Layer_Name" at 577,-858.49 h60
Mechanical 17:
  text ".Layer_Name" at 577,-858.49 h60
Mechanical 18:
  text ".Layer_Name" at 577,-858.49 h60
Mechanical 19:
  text ".Layer_Name" at 577,-858.49 h60

## Dimensions
0,0 to 0,2400 on M2 Board Dimensions
2200,0 to 0,2400 on M2 Board Dimensions
0,-400 to 1000,-400 on M2 Board Dimensions

## Text inside footprints (layer, text, board x,y; h text height)
Logo2: Bottom Overlay "For evaluation only; not FCC approved for resale." at 1727.07,276.1 h60
Logo4: Bottom Overlay "RoHS Exempt" at 1274.29,345.32 h60
ZZ1: M5 Assembly Top "Install label in silkscreened box after final wash.  Text shall be 8 pt font.  Text shall be per the Label Table in the PDF schematic." at 100,2720 h40